# Altium PCB R45_PCBM.PcbDoc (part 7 of 8)
Units mm, origin at the board's own origin, x right, y up, seen from the top; angles counter-clockwise.
Board outline 109 x 109 mm, 4 copper layers (Top Layer, Layer 1, Layer 2, Bottom Layer), stack 0.98 mm thick; 9 components, 0 nets, 14 pads, 1504 vias.
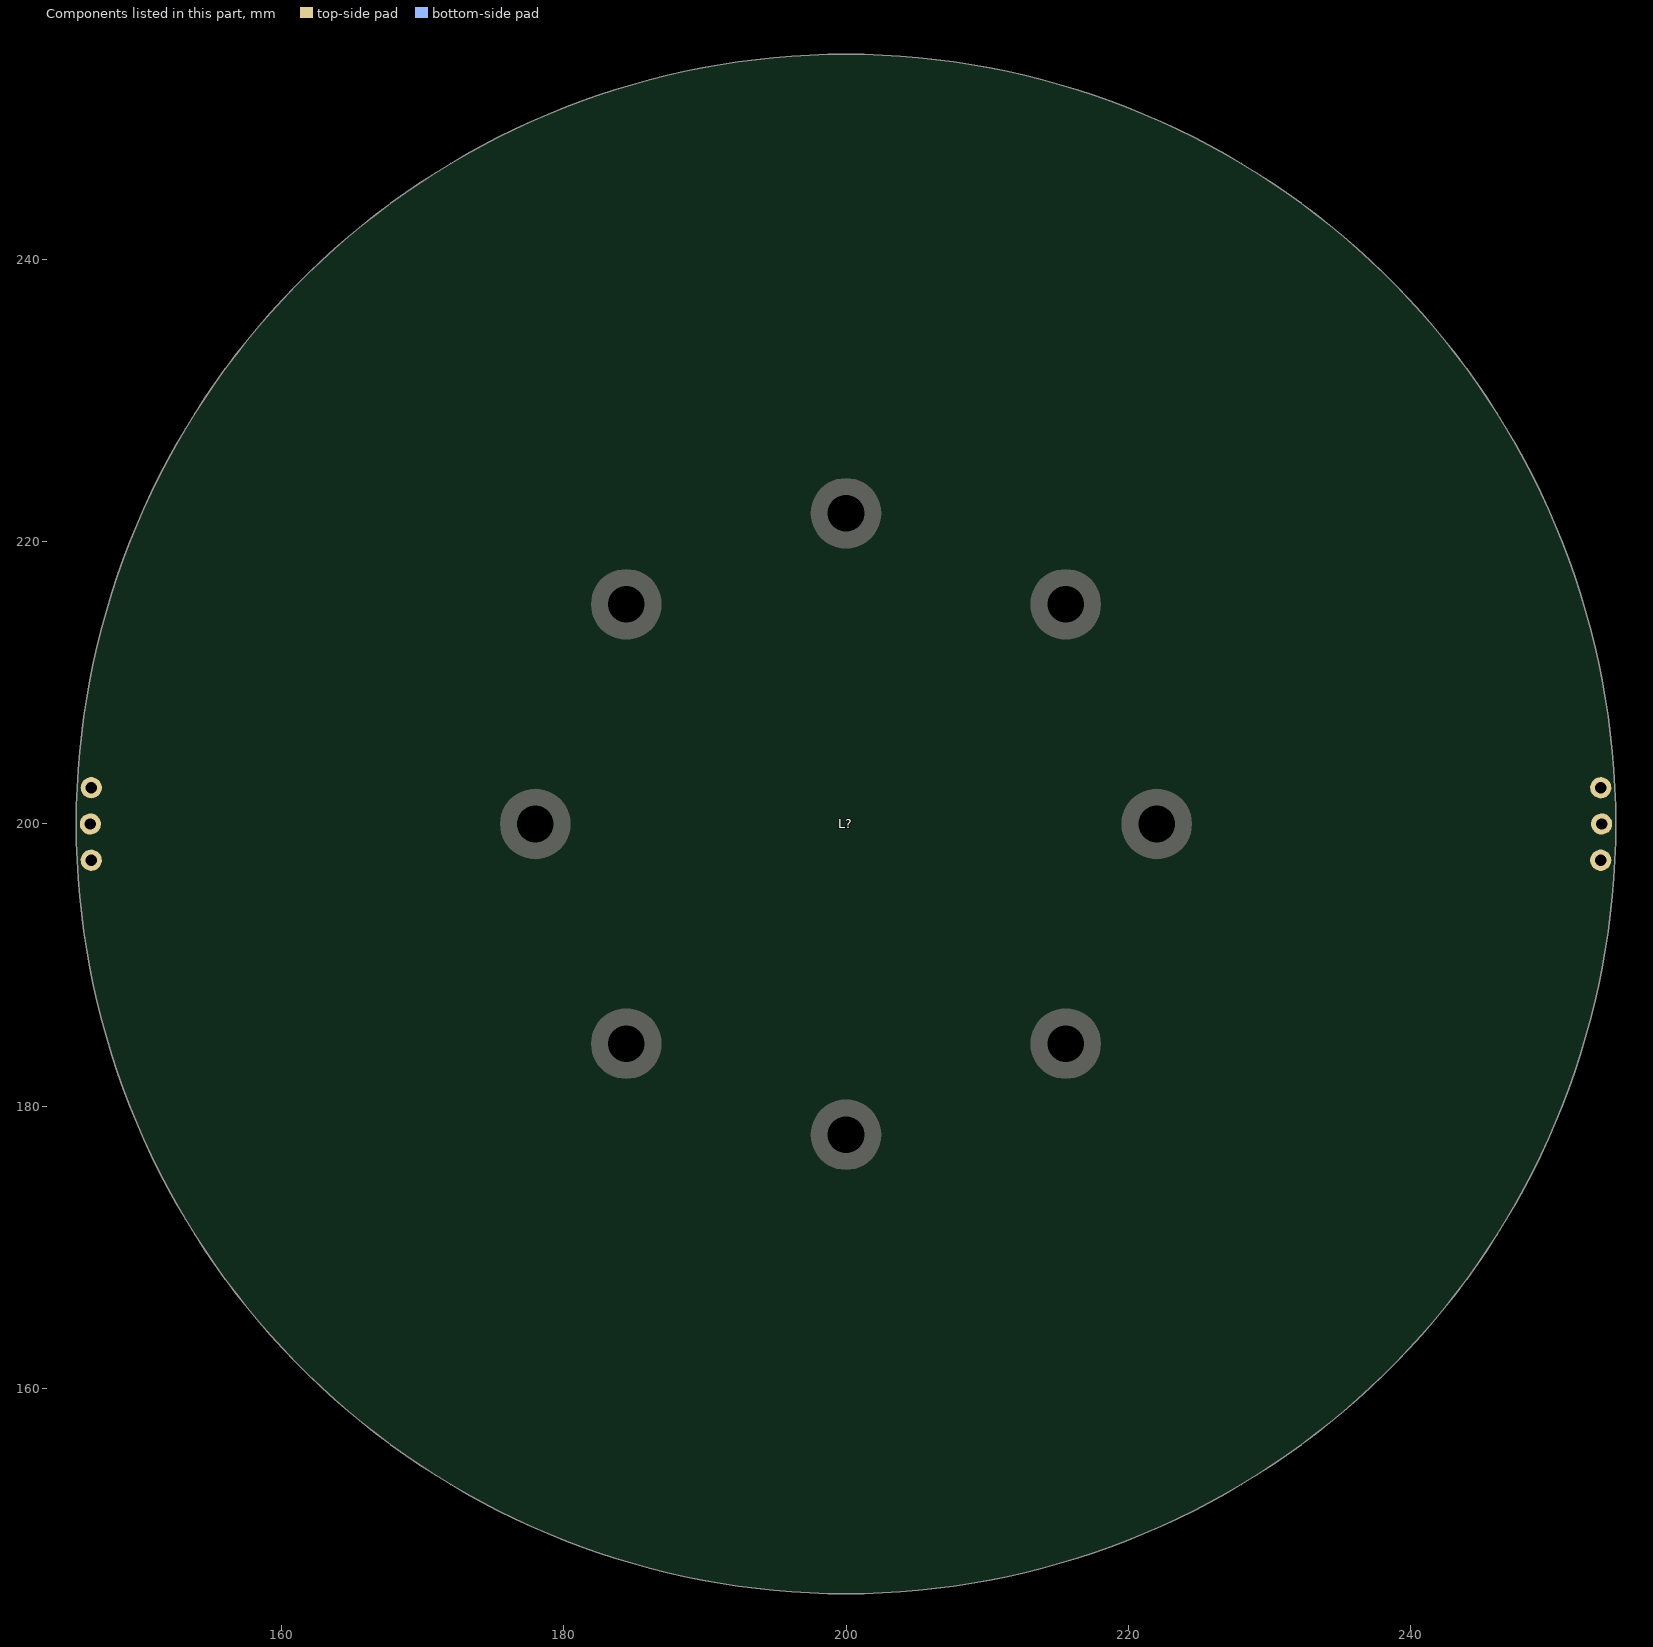
[diagram p9: the components of this part, seen from the top]

## Footprints (in the part's own frame and the unit in brackets; to place one, negate y for a bottom-side part, rotate by r counter-clockwise, add the part's x,y. Pads: shape width x height; smd on the part's side, far side on the other; paste and mask are expansions set on the pad) (continued)
R45_stator [mm] (continued)
  Bottom Layer region: 50.014,8.304 50.012,8.246 49.987,8.192 49.944,8.152 49.889,8.132 49.889,8.132 28.751,4.79 28.675,4.798 28.612,4.842 28.58,4.912 28.58,4.912 28.536,5.159 28.543,5.236 28.586,5.299 28.655,5.332 28.655,5.332 48.431,9.182 48.54,9.227 48.623,9.309 48.668,9.417 48.668,9.534 48.668,9.534 47.166,15.325 44.978,20.893 44.978,20.893 44.908,20.988 44.808,21.048 44.693,21.066 44.579,21.039 44.579,21.039 26.183,12.467 26.037,12.359 25.942,12.204 25.915,12.024 25.958,11.847 25.958,11.847 26.005,11.649 25.972,11.448 25.862,11.276 25.694,11.16 25.694,11.16 25.245,10.97 25.127,10.88 25.066,10.744 25.078,10.596 25.078,10.596 26.285,7.09 26.367,6.966 26.498,6.896 26.647,6.898 26.647,6.898 27.118,7.025 27.322,7.037 27.514,6.969 27.664,6.831 27.749,6.646 27.749,6.646 27.823,6.48 27.956,6.355 28.126,6.29 28.308,6.296 28.308,6.296 46.556,10.514 46.662,10.562 46.743,10.648 46.784,10.757 46.78,10.874 46.78,10.874 45.677,14.841 44.238,18.699 44.238,18.699 44.172,18.796 44.074,18.86 43.959,18.882 43.844,18.859 43.844,18.859 26.738,11.603 26.662,11.592 26.591,11.62 26.543,11.68 26.543,11.68 26.441,11.909 26.428,11.985 26.455,12.057 26.514,12.106 26.514,12.106 44.438,20.47 44.495,20.484 44.553,20.475 44.603,20.445 44.638,20.397 44.638,20.397 46.675,15.166 48.102,9.736 48.102,9.736 48.102,9.677 48.079,9.623 48.038,9.581 47.983,9.559 47.983,9.559 26.07,5.306 25.999,5.309 25.937,5.345 25.899,5.404 25.899,5.404 23.736,11.687 23.729,11.757 23.756,11.823 23.81,11.869 23.81,11.869 45.141,22.745 45.198,22.761 45.256,22.754 45.307,22.725 45.343,22.679 45.343,22.679 48.217,15.667 50.014,8.304
  Bottom Layer region: 40.81,21.222 40.827,21.165 40.821,21.106 40.792,21.054 40.746,21.018 40.746,21.018 25.864,13.44 25.789,13.424 25.715,13.447 25.663,13.503 25.663,13.503 25.545,13.725 25.528,13.8 25.55,13.873 25.605,13.926 25.605,13.926 40.209,22.027 40.266,22.045 40.325,22.04 40.377,22.012 40.414,21.966 40.414,21.966
  Bottom Layer region: 42.489,-17.622 42.805,-16.84 42.816,-16.781 42.804,-16.724 42.77,-16.675 42.72,-16.643 42.72,-16.643 27.127,-10.663 27.051,-10.655 26.98,-10.685 26.934,-10.747 26.934,-10.747 26.84,-10.979 26.831,-11.056 26.86,-11.127 26.921,-11.174 26.921,-11.174 42.291,-17.703 42.349,-17.715 42.407,-17.704 42.457,-17.671 42.489,-17.622
  Bottom Layer region: 43.137,-19.697 43.968,-17.764 44.713,-15.797 44.713,-15.797 44.721,-15.739 44.706,-15.682 44.671,-15.635 44.62,-15.605 44.62,-15.605 27.483,-9.71 27.406,-9.704 27.337,-9.737 27.293,-9.8 27.293,-9.8 27.207,-10.036 27.2,-10.113 27.232,-10.182 27.294,-10.227 27.294,-10.227 43.181,-16.331 43.28,-16.393 43.347,-16.489 43.373,-16.603 43.353,-16.719 43.353,-16.719 43.082,-17.406 42.799,-18.089 42.799,-18.089 42.734,-18.186 42.636,-18.25 42.521,-18.272 42.406,-18.248 42.406,-18.248 26.463,-11.487 26.343,-11.394 26.284,-11.254 26.301,-11.103 26.3,-11.103 26.974,-9.347 27.063,-9.224 27.201,-9.16 27.352,-9.171 27.352,-9.171 43.423,-14.71 43.482,-14.718 43.539,-14.703 43.586,-14.666 43.615,-14.615 43.615,-14.615 43.875,-13.813 43.882,-13.754 43.866,-13.697 43.829,-13.651 43.777,-13.623 43.777,-13.623 26.526,-8.354 26.452,-8.351 26.385,-8.383 26.342,-8.444 26.342,-8.444 25.226,-11.351 25.217,-11.425 25.245,-11.494 25.303,-11.541 25.303,-11.541 42.937,-19.77 42.994,-19.784 43.052,-19.775 43.103,-19.744 43.137,-19.697
  Bottom Layer region: 43.651,-25.787 43.612,-25.83 43.558,-25.856 43.5,-25.859 43.444,-25.839 43.444,-25.839 25.103,-14.812 25.05,-14.756 25.031,-14.682 25.051,-14.608 25.051,-14.608 25.176,-14.391 25.231,-14.336 25.304,-14.316 25.379,-14.334 25.379,-14.334 43.003,-24.097 43.114,-24.133 43.231,-24.123 43.335,-24.069 43.411,-23.98 43.411,-23.98 45.982,-18.578 47.885,-12.906 47.885,-12.906 47.892,-12.789 47.855,-12.678 47.778,-12.59 47.673,-12.538 47.673,-12.538 28.071,-7.28 27.89,-7.268 27.717,-7.327 27.58,-7.447 27.5,-7.61 27.5,-7.61 27.409,-7.793 27.254,-7.925 27.06,-7.986 26.857,-7.967 26.857,-7.967 26.39,-7.824 26.241,-7.817 26.108,-7.882 26.022,-8.003 26.022,-8.003 24.693,-11.465 24.676,-11.612 24.732,-11.75 24.846,-11.844 24.846,-11.844 25.289,-12.05 25.453,-12.171 25.557,-12.347 25.583,-12.549 25.529,-12.745 25.529,-12.745 25.479,-12.921 25.5,-13.102 25.589,-13.26 25.732,-13.373 25.732,-13.373 42.422,-21.871 42.535,-21.903 42.651,-21.889 42.753,-21.832 42.826,-21.739 42.826,-21.739 44.53,-17.991 45.908,-14.111 45.908,-14.111 45.92,-13.995 45.886,-13.882 45.812,-13.792 45.709,-13.736 45.709,-13.736 27.941,-8.299 27.876,-8.258 27.839,-8.191 27.841,-8.114 27.841,-8.114 27.91,-7.873 27.949,-7.807 28.016,-7.769 28.093,-7.769 28.093,-7.769 47.199,-12.883 47.252,-12.909 47.291,-12.953 47.31,-13.009 47.305,-13.068 47.305,-13.068 45.503,-18.385 43.106,-23.461 43.106,-23.461 43.068,-23.506 43.016,-23.533 42.958,-23.538 42.902,-23.52 42.902,-23.52 23.381,-12.693 23.329,-12.645 23.305,-12.578 23.314,-12.508 23.314,-12.508 25.695,-6.305 25.735,-6.246 25.798,-6.213 25.868,-6.212 25.868,-6.212 49.2,-11.592 49.254,-11.616 49.294,-11.659 49.315,-11.714 49.313,-11.773 49.313,-11.773 47.007,-18.992 43.651,-25.787
  Bottom Layer region: 41.156,-20.542 41.526,-19.785 41.541,-19.727 41.533,-19.669 41.502,-19.618 41.455,-19.583 41.455,-19.583 26.317,-12.529 26.241,-12.516 26.169,-12.541 26.119,-12.599 26.119,-12.599 26.009,-12.825 25.994,-12.9 26.018,-12.973 26.076,-13.024 26.076,-13.024 40.954,-20.61 41.01,-20.626 41.069,-20.619 41.121,-20.59 41.156,-20.542
  Bottom Layer region: 24.732,38.784 24.017,39.231 23.961,39.251 23.902,39.249 23.849,39.224 23.809,39.181 23.809,39.181 15.211,24.863 15.19,24.789 15.208,24.715 15.261,24.659 15.261,24.659 15.473,24.526 15.547,24.503 15.622,24.52 15.679,24.571 15.679,24.571 24.778,38.575 24.8,38.63 24.799,38.689 24.775,38.743 24.732,38.784
  Bottom Layer region: 26.888,39.061 25.129,40.215 23.321,41.29 23.321,41.29 23.265,41.308 23.207,41.304 23.154,41.277 23.116,41.232 23.116,41.232 14.334,25.379 14.316,25.304 14.336,25.231 14.391,25.176 14.391,25.176 14.608,25.051 14.682,25.031 14.756,25.05 14.812,25.104 14.812,25.103 23.581,39.689 23.66,39.776 23.766,39.825 23.883,39.831 23.993,39.791 23.993,39.791 24.623,39.405 25.246,39.008 25.246,39.008 25.33,38.926 25.377,38.819 25.378,38.702 25.335,38.593 25.335,38.593 15.907,24.067 15.795,23.964 15.647,23.93 15.501,23.973 15.501,23.973 13.889,24.941 13.783,25.05 13.744,25.197 13.782,25.344 13.782,25.344 22.027,40.209 22.045,40.266 22.04,40.325 22.012,40.377 21.966,40.414 21.966,40.414 21.222,40.81 21.165,40.827 21.106,40.821 21.054,40.792 21.018,40.746 21.018,40.746 12.833,24.672 12.817,24.6 12.838,24.529 12.89,24.476 12.89,24.476 15.559,22.872 15.631,22.85 15.703,22.866 15.759,22.914 15.759,22.914 26.926,38.852 26.949,38.906 26.951,38.964 26.929,39.019 26.888,39.061
  Bottom Layer region: 32.975,38.51 33.011,38.464 33.027,38.407 33.02,38.349 32.99,38.297 32.99,38.297 18.946,22.15 18.882,22.107 18.806,22.101 18.736,22.134 18.736,22.134 18.544,22.295 18.5,22.358 18.492,22.434 18.524,22.504 18.524,22.504 31.198,38.165 31.253,38.269 31.263,38.385 31.228,38.497 31.153,38.587 31.153,38.587 26.28,42.058 21.025,44.916 21.025,44.916 20.911,44.944 20.796,44.926 20.695,44.866 20.626,44.771 20.626,44.771 12.044,26.381 12.001,26.204 12.029,26.024 12.123,25.868 12.27,25.761 12.27,25.761 12.434,25.639 12.537,25.464 12.564,25.262 12.509,25.065 12.509,25.065 12.287,24.63 12.255,24.485 12.296,24.342 12.4,24.237 12.4,24.237 15.578,22.327 15.721,22.285 15.866,22.315 15.979,22.412 15.979,22.412 16.259,22.813 16.406,22.953 16.597,23.024 16.801,23.015 16.985,22.928 16.985,22.928 17.149,22.848 17.331,22.838 17.503,22.898 17.638,23.019 17.638,23.019 28.905,37.98 28.956,38.085 28.963,38.202 28.924,38.313 28.846,38.4 28.846,38.4 25.451,40.73 21.869,42.76 21.869,42.76 21.756,42.792 21.64,42.778 21.537,42.721 21.465,42.629 21.465,42.629 13.024,26.076 12.973,26.018 12.9,25.994 12.825,26.009 12.825,26.009 12.599,26.119 12.541,26.169 12.516,26.241 12.529,26.317 12.529,26.317 20.883,44.245 20.918,44.293 20.968,44.323 21.027,44.332 21.084,44.317 21.084,44.317 26.007,41.62 30.59,38.377 30.59,38.377 30.628,38.332 30.645,38.276 30.64,38.218 30.613,38.166 30.613,38.166 16.56,20.822 16.504,20.779 16.434,20.766 16.366,20.787 16.366,20.787 10.671,24.21 10.62,24.259 10.599,24.327 10.61,24.397 10.61,24.397 19.959,46.44 19.993,46.489 20.042,46.521 20.1,46.531 20.157,46.519 20.157,46.519 26.866,42.995 32.975,38.51
  Bottom Layer region: 27.377,36.964 26.695,37.46 26.641,37.484 26.582,37.486 26.527,37.465 26.484,37.424 26.484,37.424 16.909,23.742 16.882,23.669 16.895,23.594 16.944,23.534 16.944,23.534 17.147,23.387 17.218,23.359 17.294,23.37 17.354,23.418 17.354,23.418 27.409,36.752 27.434,36.806 27.437,36.865 27.417,36.92 27.377,36.964
  Bottom Layer region: 17.622,42.489 17.671,42.457 17.704,42.407 17.715,42.349 17.703,42.291 17.703,42.291 11.174,26.921 11.127,26.86 11.056,26.831 10.979,26.84 10.979,26.84 10.747,26.934 10.685,26.98 10.655,27.051 10.663,27.127 10.663,27.127 16.643,42.72 16.675,42.77 16.724,42.804 16.781,42.816 16.84,42.805 16.84,42.805
  Bottom Layer region: 9.976,44.904 9.151,45.079 9.092,45.08 9.037,45.057 8.995,45.016 8.972,44.961 8.972,44.961 5.79,28.566 5.796,28.49 5.838,28.426 5.906,28.391 5.906,28.391 6.152,28.339 6.229,28.343 6.293,28.384 6.329,28.452 6.329,28.452 10.091,44.723 10.092,44.782 10.071,44.837 10.03,44.88 9.976,44.904
  Bottom Layer region: 11.907,45.902 9.859,46.385 7.793,46.776 7.793,46.776 7.734,46.774 7.68,46.75 7.64,46.707 7.62,46.652 7.62,46.652 4.79,28.751 4.798,28.675 4.842,28.612 4.912,28.58 4.912,28.58 5.159,28.536 5.236,28.543 5.299,28.586 5.332,28.655 5.332,28.655 8.584,45.36 8.629,45.469 8.711,45.552 8.819,45.597 8.937,45.598 8.937,45.598 9.661,45.45 10.382,45.29 10.382,45.29 10.489,45.242 10.569,45.157 10.611,45.048 10.607,44.93 10.607,44.93 6.717,28.056 6.646,27.921 6.519,27.839 6.367,27.829 6.367,27.829 4.521,28.188 4.384,28.254 4.297,28.378 4.282,28.529 4.282,28.529 6.946,45.318 6.944,45.377 6.919,45.431 6.875,45.47 6.819,45.49 6.819,45.49 5.984,45.607 5.925,45.604 5.872,45.578 5.833,45.533 5.814,45.477 5.814,45.477 3.621,27.574 3.631,27.5 3.674,27.44 3.741,27.408 3.741,27.408 6.798,26.814 6.873,26.818 6.936,26.858 6.972,26.922 6.972,26.922 12.014,45.718 12.018,45.777 11.999,45.832 11.96,45.876 11.907,45.902
  Bottom Layer region: 17.815,47.465 17.865,47.434 17.899,47.387 17.912,47.329 17.902,47.271 17.902,47.271 10.227,27.294 10.182,27.232 10.113,27.2 10.036,27.207 10.036,27.207 9.8,27.293 9.737,27.337 9.704,27.406 9.71,27.483 9.71,27.483 16.264,46.534 16.279,46.65 16.249,46.763 16.178,46.856 16.077,46.915 16.077,46.915 10.311,48.51 4.395,49.398 4.395,49.398 4.278,49.386 4.176,49.329 4.102,49.238 4.069,49.126 4.069,49.126 2.295,28.909 2.315,28.728 2.402,28.568 2.544,28.454 2.719,28.404 2.719,28.404 2.915,28.346 3.072,28.216 3.166,28.035 3.182,27.832 3.182,27.832 3.122,27.347 3.141,27.2 3.229,27.08 3.363,27.016 3.363,27.016 7.002,26.309 7.151,26.317 7.277,26.396 7.349,26.526 7.349,26.526 7.476,26.998 7.567,27.18 7.722,27.312 7.916,27.374 8.119,27.354 8.119,27.354 8.3,27.336 8.474,27.388 8.615,27.503 8.702,27.664 8.702,27.664 14.172,45.575 14.184,45.692 14.15,45.804 14.076,45.895 13.973,45.95 13.973,45.95 9.985,46.978 5.925,47.661 5.925,47.661 5.808,47.652 5.703,47.6 5.627,47.511 5.59,47.4 5.59,47.4 3.321,28.958 3.292,28.886 3.232,28.839 3.156,28.827 3.156,28.827 2.906,28.853 2.835,28.88 2.786,28.94 2.773,29.015 2.773,29.015 4.491,48.719 4.507,48.776 4.544,48.822 4.596,48.85 4.655,48.856 4.655,48.856 10.204,48.005 15.619,46.525 15.619,46.525 15.67,46.496 15.706,46.449 15.721,46.392 15.713,46.334 15.713,46.334 8.44,25.23 8.402,25.17 8.34,25.135 8.269,25.131 8.269,25.131 1.747,26.399 1.683,26.429 1.639,26.485 1.626,26.554 1.626,26.554 2.872,50.466 2.887,50.523 2.922,50.57 2.973,50.6 3.031,50.608 3.031,50.608 10.541,49.591 17.815,47.465
  Bottom Layer region: 2.027,45.954 2.084,45.94 2.132,45.905 2.163,45.854 2.171,45.796 2.171,45.796 1.292,29.119 1.269,29.046 1.212,28.994 1.137,28.977 1.137,28.977 0.887,28.985 0.813,29.008 0.76,29.063 0.742,29.138 0.742,29.138 1.029,45.836 1.041,45.894 1.075,45.942 1.125,45.973 1.184,45.983 1.184,45.983
  Bottom Layer region: 13.084,44.098 12.273,44.331 12.214,44.336 12.158,44.317 12.113,44.278 12.087,44.225 12.087,44.225 7.769,28.093 7.769,28.016 7.807,27.949 7.873,27.91 7.873,27.91 8.114,27.841 8.191,27.839 8.258,27.876 8.299,27.941 8.299,27.941 13.186,43.91 13.192,43.969 13.174,44.026 13.136,44.071 13.084,44.098
  Bottom Layer region: 31.091,33.9 31.126,33.852 31.14,33.795 31.131,33.736 31.1,33.686 31.1,33.686 19.707,21.475 19.642,21.435 19.565,21.431 19.497,21.466 19.497,21.466 19.311,21.634 19.269,21.698 19.264,21.775 19.298,21.844 19.298,21.844 30.251,34.451 30.298,34.487 30.355,34.502 30.413,34.494 30.464,34.464 30.464,34.464
  Bottom Layer region: 36.505,27.986 35.986,28.65 35.941,28.689 35.885,28.707 35.826,28.702 35.773,28.675 35.773,28.675 22.798,18.161 22.753,18.099 22.744,18.023 22.774,17.952 22.774,17.952 22.929,17.755 22.99,17.708 23.066,17.698 23.137,17.727 23.137,17.727 36.477,27.774 36.517,27.818 36.536,27.874 36.532,27.933 36.505,27.986
  Bottom Layer region: 38.626,27.509 37.368,29.195 36.037,30.824 36.037,30.824 35.991,30.86 35.934,30.876 35.875,30.869 35.824,30.839 35.824,30.839 22.15,18.946 22.107,18.882 22.101,18.806 22.134,18.736 22.134,18.736 22.295,18.544 22.358,18.5 22.434,18.492 22.504,18.524 22.504,18.524 35.733,29.23 35.837,29.285 35.954,29.295 36.065,29.26 36.155,29.185 36.155,29.185 36.615,28.607 37.065,28.021 37.065,28.021 37.116,27.915 37.123,27.798 37.085,27.688 37.007,27.6 37.007,27.6 23.179,17.175 23.039,17.117 22.888,17.135 22.766,17.225 22.766,17.225 21.582,18.687 21.52,18.825 21.533,18.977 21.619,19.102 21.619,19.102 34.451,30.251 34.487,30.298 34.502,30.355 34.494,30.413 34.464,30.464 34.464,30.464 33.9,31.091 33.852,31.126 33.795,31.14 33.736,31.131 33.686,31.1 33.686,31.1 20.498,18.795 20.458,18.733 20.453,18.659 20.484,18.591 20.484,18.591 22.444,16.171 22.503,16.126 22.577,16.116 22.646,16.142 22.646,16.142 38.59,27.3 38.631,27.342 38.652,27.397 38.65,27.456 38.626,27.509
  Bottom Layer region: 44.157,24.909 44.176,24.853 44.171,24.795 44.144,24.742 44.099,24.704 44.099,24.704 25.379,14.334 25.304,14.316 25.231,14.336 25.176,14.391 25.176,14.391 25.051,14.608 25.031,14.682 25.05,14.756 25.104,14.812 25.104,14.812 42.37,25.193 42.457,25.272 42.506,25.378 42.512,25.495 42.472,25.605 42.472,25.605 39.08,30.533 35.119,35.016 35.119,35.016 35.022,35.081 34.907,35.104 34.792,35.082 34.695,35.017 34.695,35.017 20.34,20.67 20.239,20.519 20.204,20.34 20.239,20.162 20.341,20.01 20.341,20.01 20.453,19.841 20.49,19.64 20.446,19.441 20.328,19.275 20.328,19.275 19.97,18.942 19.89,18.817 19.88,18.669 19.942,18.534 19.942,18.534 22.275,15.653 22.394,15.564 22.541,15.543 22.68,15.596 22.68,15.596 23.08,15.876 23.267,15.957 23.471,15.959 23.659,15.881 23.802,15.736 23.802,15.736 23.929,15.605 24.097,15.533 24.279,15.531 24.448,15.598 24.448,15.598 40.152,25.803 40.236,25.885 40.282,25.993 40.283,26.11 40.24,26.218 40.24,26.218 37.846,29.569 35.175,32.702 35.175,32.702 35.08,32.77 34.966,32.797 34.85,32.779 34.75,32.717 34.75,32.717 21.157,20.048 21.09,20.012 21.013,20.014 20.947,20.054 20.947,20.054 20.773,20.234 20.735,20.302 20.736,20.378 20.775,20.445 20.775,20.445 34.757,34.435 34.805,34.467 34.863,34.479 34.921,34.467 34.97,34.434 34.97,34.434 38.673,30.215 41.871,25.6 41.871,25.6 41.891,25.545 41.889,25.487 41.864,25.433 41.82,25.394 41.82,25.394 22.683,13.902 22.615,13.881 22.545,13.893 22.489,13.936 22.489,13.936 18.307,19.1 18.277,19.164 18.28,19.235 18.314,19.297 18.314,19.297 34.639,36.813 34.687,36.847 34.744,36.861 34.802,36.851 34.852,36.82 34.852,36.82 39.951,31.213 44.157,24.909
  Bottom Layer region: 38.369,25.371 37.897,26.07 37.855,26.112 37.8,26.134 37.741,26.133 37.687,26.109 37.687,26.109 24.009,16.527 23.96,16.468 23.946,16.392 23.971,16.32 23.971,16.32 24.111,16.112 24.169,16.061 24.244,16.046 24.317,16.07 24.317,16.07 38.326,25.162 38.368,25.203 38.391,25.258 38.391,25.317 38.369,25.371
  Bottom Layer region: -41.848,19.094 -42.191,18.323 -42.204,18.265 -42.194,18.207 -42.162,18.158 -42.113,18.124 -42.113,18.124 -26.738,11.603 -26.662,11.592 -26.591,11.62 -26.543,11.68 -26.543,11.68 -26.441,11.909 -26.428,11.985 -26.455,12.057 -26.514,12.106 -26.514,12.106 -41.648,19.169 -41.705,19.182 -41.764,19.173 -41.814,19.142 -41.848,19.094
  Bottom Layer region: -41.156,20.542 -41.526,19.785 -41.541,19.727 -41.533,19.669 -41.502,19.618 -41.455,19.583 -41.455,19.583 -26.183,12.467 -26.037,12.359 -25.942,12.204 -25.915,12.024 -25.958,11.847 -25.958,11.847 -26.005,11.649 -25.972,11.448 -25.862,11.276 -25.694,11.16 -25.694,11.16 -25.63,11.133 -25.51,11.04 -25.451,10.9 -25.467,10.749 -25.467,10.749 -26.119,9.053 -26.207,8.929 -26.345,8.865 -26.497,8.876 -26.497,8.876 -26.562,8.899 -26.764,8.926 -26.961,8.871 -27.12,8.744 -27.217,8.565 -27.217,8.565 -27.304,8.405 -27.445,8.29 -27.619,8.237 -27.8,8.255 -27.8,8.255 -43.91,13.186 -43.969,13.192 -44.026,13.174 -44.071,13.136 -44.098,13.084 -44.098,13.084 -44.331,12.273 -44.336,12.214 -44.317,12.158 -44.278,12.113 -44.225,12.087 -44.225,12.087 -25.992,7.207 -25.92,7.205 -25.855,7.238 -25.813,7.298 -25.813,7.298 -24.066,11.849 -24.057,11.921 -24.083,11.989 -24.138,12.036 -24.138,12.036 -40.954,20.61 -41.01,20.626 -41.069,20.619 -41.121,20.59 -41.156,20.542
  Bottom Layer region: -45.49,6.819 -45.607,5.984 -45.604,5.925 -45.578,5.872 -45.533,5.833 -45.477,5.814 -45.477,5.814 -28.901,3.784 -28.825,3.794 -28.764,3.841 -28.734,3.912 -28.734,3.912 -28.699,4.16 -28.708,4.236 -28.754,4.298 -28.824,4.329 -28.824,4.329 -45.318,6.946 -45.377,6.944 -45.431,6.919 -45.47,6.875 -45.49,6.819
  Bottom Layer region: -45.371,-7.572 -45.224,-8.402 -45.203,-8.458 -45.162,-8.5 -45.107,-8.523 -45.048,-8.524 -45.048,-8.524 -28.511,-5.304 -28.329,-5.305 -28.161,-5.376 -28.033,-5.505 -27.964,-5.673 -27.964,-5.673 -27.886,-5.862 -27.74,-6.005 -27.551,-6.079 -27.347,-6.074 -27.347,-6.074 -26.065,-5.777 -25.92,-5.78 -25.793,-5.85 -25.714,-5.972 -25.714,-5.972 -23.939,-11.125 -23.927,-11.269 -23.984,-11.403 -24.096,-11.494 -24.096,-11.494 -25.289,-12.05 -25.453,-12.171 -25.557,-12.347 -25.583,-12.549 -25.529,-12.745 -25.529,-12.745 -25.479,-12.921 -25.5,-13.102 -25.589,-13.26 -25.732,-13.373 -25.732,-13.373 -40.746,-21.018 -40.792,-21.054 -40.821,-21.106 -40.827,-21.165 -40.81,-21.222 -40.81,-21.222 -40.414,-21.966 -40.377,-22.012 -40.325,-22.04 -40.266,-22.045 -40.209,-22.027 -40.209,-22.027 -22.695,-12.312 -22.644,-12.266 -22.619,-12.201 -22.626,-12.132 -22.626,-12.132 -25.299,-4.37 -25.336,-4.311 -25.395,-4.275 -25.464,-4.27 -25.464,-4.27 -45.247,-7.398 -45.302,-7.418 -45.345,-7.459 -45.369,-7.513 -45.371,-7.572
  Bottom Layer region: -44.732,-10.718 -44.528,-11.537 -44.503,-11.59 -44.459,-11.63 -44.403,-11.649 -44.344,-11.645 -44.344,-11.645 -28.071,-7.28 -27.89,-7.268 -27.717,-7.327 -27.58,-7.447 -27.5,-7.61 -27.5,-7.61 -27.409,-7.793 -27.254,-7.925 -27.06,-7.986 -26.857,-7.967 -26.857,-7.967 -26.79,-7.946 -26.638,-7.94 -26.503,-8.009 -26.419,-8.136 -26.419,-8.136 -25.827,-9.854 -25.815,-10.006 -25.88,-10.143 -26.003,-10.232 -26.003,-10.232 -26.068,-10.257 -26.24,-10.366 -26.356,-10.534 -26.396,-10.734 -26.355,-10.934 -26.355,-10.934 -26.318,-11.112 -26.352,-11.291 -26.452,-11.443 -26.603,-11.546 -26.603,-11.546 -42.113,-18.124 -42.162,-18.158 -42.194,-18.207 -42.204,-18.265 -42.191,-18.323 -42.191,-18.323 -41.848,-19.094 -41.814,-19.142 -41.764,-19.173 -41.705,-19.182 -41.648,-19.169 -41.648,-19.169 -24.543,-11.187 -24.487,-11.141 -24.459,-11.074 -24.465,-11.002 -24.465,-11.002 -26.052,-6.393 -26.092,-6.332 -26.155,-6.296 -26.228,-6.295 -26.228,-6.295 -44.62,-10.536 -44.674,-10.56 -44.714,-10.604 -44.735,-10.659 -44.732,-10.718
  Bottom Layer region: -44.331,-12.273 -44.098,-13.084 -44.071,-13.136 -44.026,-13.174 -43.969,-13.192 -43.91,-13.186 -43.91,-13.186 -27.941,-8.299 -27.876,-8.258 -27.839,-8.191 -27.841,-8.114 -27.841,-8.114 -27.91,-7.873 -27.949,-7.807 -28.016,-7.769 -28.093,-7.769 -28.093,-7.769 -44.225,-12.087 -44.278,-12.113 -44.317,-12.158 -44.336,-12.214 -44.331,-12.273
  Bottom Layer region: -45.079,-9.151 -44.904,-9.976 -44.88,-10.03 -44.837,-10.071 -44.782,-10.092 -44.723,-10.091 -44.723,-10.091 -28.452,-6.329 -28.384,-6.293 -28.343,-6.229 -28.339,-6.152 -28.339,-6.152 -28.391,-5.906 -28.426,-5.838 -28.49,-5.796 -28.566,-5.79 -28.566,-5.79 -44.961,-8.972 -45.016,-8.995 -45.057,-9.037 -45.08,-9.092 -45.079,-9.151
  Bottom Layer region: -45.789,-4.389 -45.7,-5.227 -45.683,-5.284 -45.645,-5.329 -45.592,-5.356 -45.533,-5.36 -45.533,-5.36 -28.958,-3.321 -28.886,-3.292 -28.839,-3.232 -28.827,-3.156 -28.827,-3.156 -28.853,-2.906 -28.88,-2.835 -28.94,-2.786 -29.015,-2.773 -29.015,-2.773 -45.652,-4.223 -45.709,-4.24 -45.755,-4.277 -45.783,-4.33 -45.789,-4.389
  Bottom Layer region: -45.224,8.402 -45.371,7.572 -45.369,7.513 -45.345,7.459 -45.302,7.418 -45.247,7.398 -45.247,7.398 -28.606,4.767 -28.435,4.704 -28.301,4.58 -28.225,4.415 -28.218,4.233 -28.218,4.233 -28.209,4.029 -28.121,3.845 -27.968,3.71 -27.775,3.646 -27.775,3.646 -26.469,3.486 -26.333,3.434 -26.238,3.324 -26.206,3.183 -26.206,3.183 -26.301,-2.266 -26.338,-2.406 -26.437,-2.513 -26.575,-2.56 -26.575,-2.56 -27.886,-2.674 -28.081,-2.732 -28.238,-2.862 -28.332,-3.042 -28.348,-3.246 -28.348,-3.246 -28.362,-3.427 -28.444,-3.59 -28.582,-3.709 -28.754,-3.766 -28.754,-3.766 -45.477,-5.814 -45.533,-5.833 -45.578,-5.872 -45.604,-5.925 -45.607,-5.984 -45.607,-5.984 -45.49,-6.819 -45.47,-6.875 -45.431,-6.919 -45.377,-6.944 -45.318,-6.946 -45.318,-6.946 -25.537,-3.808 -25.473,-3.781 -25.428,-3.729 -25.411,-3.662 -25.411,-3.662 -25.268,4.547 -25.282,4.614 -25.326,4.668 -25.389,4.697 -25.389,4.697 -45.048,8.524 -45.107,8.523 -45.162,8.5 -45.203,8.458 -45.224,8.402
  Bottom Layer region: -39.623,23.363 -40.045,22.633 -40.064,22.577 -40.06,22.518 -40.033,22.465 -39.988,22.427 -39.988,22.427 -25.25,14.263 -25.111,14.145 -25.028,13.984 -25.013,13.802 -25.068,13.629 -25.068,13.629 -25.13,13.434 -25.11,13.231 -25.013,13.052 -24.853,12.926 -24.853,12.926 -23.681,12.328 -23.571,12.233 -23.519,12.098 -23.537,11.954 -23.537,11.954 -25.49,6.866 -25.573,6.747 -25.702,6.681 -25.847,6.684 -25.847,6.684 -27.118,7.025 -27.322,7.037 -27.514,6.969 -27.664,6.831 -27.749,6.646 -27.749,6.646 -27.823,6.48 -27.956,6.355 -28.126,6.29 -28.308,6.296 -28.308,6.296 -44.723,10.091 -44.782,10.092 -44.837,10.071 -44.88,10.03 -44.904,9.976 -44.904,9.976 -45.079,9.151 -45.08,9.092 -45.057,9.037 -45.016,8.995 -44.961,8.972 -44.961,8.972 -25.3,5.156 -25.23,5.159 -25.17,5.193 -25.131,5.25 -25.131,5.25 -22.189,12.914 -22.179,12.983 -22.202,13.048 -22.251,13.097 -22.251,13.097 -39.416,23.417 -39.472,23.437 -39.531,23.434 -39.584,23.408 -39.623,23.363
  Bottom Layer region: -40.414,21.966 -40.81,21.222 -40.827,21.165 -40.821,21.106 -40.792,21.054 -40.746,21.018 -40.746,21.018 -25.864,13.44 -25.789,13.424 -25.715,13.447 -25.663,13.503 -25.663,13.503 -25.545,13.725 -25.528,13.8 -25.55,13.873 -25.605,13.926 -25.605,13.926 -40.209,22.027 -40.266,22.045 -40.325,22.04 -40.377,22.012 -40.414,21.966
  Bottom Layer region: -41.526,-19.785 -41.156,-20.542 -41.121,-20.59 -41.069,-20.619 -41.01,-20.626 -40.954,-20.61 -40.954,-20.61 -26.076,-13.024 -26.018,-12.973 -25.994,-12.9 -26.009,-12.825 -26.009,-12.825 -26.119,-12.599 -26.169,-12.541 -26.241,-12.516 -26.317,-12.529 -26.317,-12.529 -41.455,-19.583 -41.502,-19.618 -41.533,-19.669 -41.541,-19.727 -41.526,-19.785
  Bottom Layer region: -45.983,-1.184 -45.954,-2.027 -45.94,-2.084 -45.905,-2.132 -45.854,-2.163 -45.796,-2.171 -45.796,-2.171 -29.119,-1.292 -29.046,-1.269 -28.994,-1.212 -28.977,-1.137 -28.977,-1.137 -28.985,-0.887 -29.008,-0.813 -29.063,-0.76 -29.138,-0.742 -29.138,-0.742 -45.836,-1.029 -45.894,-1.041 -45.942,-1.075 -45.973,-1.125 -45.983,-1.184
  Bottom Layer region: -45.7,5.227 -45.789,4.389 -45.783,4.33 -45.755,4.277 -45.709,4.24 -45.652,4.223 -45.652,4.223 -28.868,2.76 -28.694,2.709 -28.552,2.595 -28.464,2.435 -28.444,2.254 -28.444,2.254 -28.421,2.052 -28.321,1.874 -28.159,1.75 -27.962,1.699 -27.962,1.699 -27.892,1.696 -27.748,1.65 -27.644,1.539 -27.608,1.391 -27.608,1.391 -27.64,-0.427 -27.681,-0.573 -27.788,-0.68 -27.935,-0.721 -27.935,-0.721 -28.004,-0.722 -28.203,-0.766 -28.369,-0.885 -28.475,-1.059 -28.506,-1.26 -28.506,-1.26 -28.532,-1.44 -28.625,-1.597 -28.771,-1.706 -28.947,-1.751 -28.947,-1.751 -45.772,-2.628 -45.829,-2.642 -45.876,-2.678 -45.906,-2.729 -45.914,-2.788 -45.914,-2.788 -45.855,-3.629 -45.839,-3.686 -45.803,-3.733 -45.751,-3.762 -45.692,-3.768 -45.692,-3.768 -26.889,-2.118 -26.821,-2.094 -26.771,-2.041 -26.753,-1.971 -26.753,-1.971 -26.667,2.903 -26.684,2.974 -26.731,3.029 -26.799,3.055 -26.799,3.055 -45.533,5.36 -45.592,5.356 -45.645,5.329 -45.683,5.284 -45.7,5.227
  Bottom Layer region: -45.983,1.184 -45.973,1.125 -45.942,1.075 -45.894,1.041 -45.836,1.029 -45.836,1.029 -29.141,0.742 -29.083,0.73 -29.035,0.696 -29.004,0.647 -28.993,0.589 -28.993,0.589 -28.996,0.423 -29.009,0.366 -29.042,0.318 -29.091,0.286 -29.149,0.275 -29.149,0.275 -45.844,0.572 -45.902,0.561 -45.952,0.529 -45.985,0.48 -45.996,0.422 -45.996,0.422 -45.996,-0.422 -45.985,-0.48 -45.952,-0.529 -45.902,-0.561 -45.844,-0.572 -45.844,-0.572 -28.239,-0.259 -28.165,-0.239 -28.112,-0.185 -28.091,-0.112 -28.091,-0.112 -28.07,1.092 -28.088,1.166 -28.14,1.222 -28.212,1.245 -28.212,1.245 -45.796,2.171 -45.854,2.163 -45.905,2.132 -45.94,2.084 -45.954,2.027 -45.954,2.027
  Bottom Layer region: -45.855,3.629 -45.914,2.788 -45.906,2.729 -45.876,2.678 -45.829,2.642 -45.772,2.628 -45.772,2.628 -29.094,1.758 -29.019,1.774 -28.962,1.825 -28.937,1.898 -28.937,1.898 -28.919,2.148 -28.934,2.223 -28.984,2.282 -29.056,2.308 -29.056,2.308 -45.692,3.768 -45.751,3.762 -45.803,3.733 -45.839,3.686 -45.855,3.629
  Bottom Layer region: -42.805,-16.84 -42.489,-17.622 -42.457,-17.671 -42.407,-17.704 -42.349,-17.715 -42.291,-17.703 -42.291,-17.703 -26.921,-11.174 -26.86,-11.127 -26.831,-11.056 -26.84,-10.979 -26.84,-10.979 -26.934,-10.747 -26.98,-10.685 -27.051,-10.655 -27.127,-10.663 -27.127,-10.663 -42.72,-16.643 -42.77,-16.675 -42.804,-16.724 -42.816,-16.781 -42.805,-16.84
  Bottom Layer region: -43.615,-14.615 -43.586,-14.666 -43.539,-14.703 -43.482,-14.718 -43.423,-14.71 -43.423,-14.71 -27.637,-9.269 -27.579,-9.262 -27.522,-9.276 -27.476,-9.312 -27.446,-9.362 -27.446,-9.362 -27.392,-9.52 -27.384,-9.578 -27.399,-9.635 -27.435,-9.681 -27.485,-9.711 -27.485,-9.711 -43.275,-15.142 -43.326,-15.172 -43.361,-15.22 -43.376,-15.277 -43.367,-15.335 -43.367,-15.335 -43.078,-16.128 -43.047,-16.178 -43,-16.213 -42.942,-16.227 -42.884,-16.217 -42.884,-16.217 -26.447,-9.902 -26.385,-9.858 -26.353,-9.789 -26.359,-9.713 -26.359,-9.713 -26.751,-8.574 -26.793,-8.511 -26.861,-8.476 -26.937,-8.48 -26.937,-8.48 -43.777,-13.623 -43.829,-13.651 -43.866,-13.697 -43.882,-13.754 -43.875,-13.813 -43.875,-13.813
  Bottom Layer region: -43.615,14.615 -43.875,13.813 -43.882,13.754 -43.866,13.697 -43.829,13.651 -43.777,13.623 -43.777,13.623 -27.805,8.745 -27.728,8.742 -27.66,8.777 -27.618,8.842 -27.618,8.842 -27.541,9.08 -27.536,9.157 -27.571,9.226 -27.634,9.269 -27.634,9.269 -43.423,14.71 -43.482,14.718 -43.539,14.703 -43.586,14.666 -43.615,14.615
  Bottom Layer region: -42.805,16.84 -42.816,16.781 -42.804,16.724 -42.77,16.675 -42.72,16.643 -42.72,16.643 -27.129,10.664 -27.08,10.633 -27.046,10.585 -27.033,10.528 -27.043,10.47 -27.043,10.47 -27.103,10.315 -27.134,10.265 -27.182,10.231 -27.239,10.218 -27.297,10.228 -27.297,10.228 -42.884,16.217 -42.942,16.227 -43,16.213 -43.047,16.178 -43.078,16.128 -43.078,16.128 -43.367,15.335 -43.376,15.277 -43.361,15.22 -43.326,15.172 -43.275,15.142 -43.275,15.142 -26.624,9.414 -26.549,9.409 -26.48,9.441 -26.435,9.503 -26.435,9.503 -26.004,10.627 -25.995,10.703 -26.025,10.772 -26.085,10.819 -26.085,10.819 -42.291,17.703 -42.349,17.715 -42.407,17.704 -42.457,17.671 -42.489,17.622 -42.489,17.622
  Bottom Layer region: -44.528,11.537 -44.732,10.718 -44.735,10.659 -44.714,10.604 -44.674,10.56 -44.62,10.536 -44.62,10.536 -28.347,6.784 -28.27,6.786 -28.205,6.826 -28.168,6.894 -28.168,6.894 -28.107,7.137 -28.108,7.214 -28.147,7.28 -28.214,7.318 -28.214,7.318 -44.344,11.645 -44.403,11.649 -44.459,11.63 -44.503,11.59 -44.528,11.537
  Bottom Layer region: -39.231,-24.017 -38.784,-24.732 -38.743,-24.775 -38.689,-24.799 -38.63,-24.8 -38.575,-24.778 -38.575,-24.778 -24.571,-15.679 -24.52,-15.622 -24.503,-15.547 -24.526,-15.473 -24.526,-15.473 -24.659,-15.261 -24.715,-15.208 -24.789,-15.19 -24.863,-15.211 -24.863,-15.211 -39.181,-23.809 -39.224,-23.849 -39.249,-23.902 -39.251,-23.961 -39.231,-24.017
  Bottom Layer region: -38.626,-27.509 -38.65,-27.456 -38.652,-27.397 -38.631,-27.342 -38.59,-27.3 -38.59,-27.3 -23.742,-16.909 -23.669,-16.882 -23.594,-16.895 -23.534,-16.944 -23.534,-16.944 -23.387,-17.147 -23.359,-17.218 -23.37,-17.294 -23.418,-17.354 -23.418,-17.354 -37.007,-27.6 -37.085,-27.688 -37.123,-27.798 -37.116,-27.915 -37.065,-28.021 -37.065,-28.021 -36.615,-28.607 -36.155,-29.185 -36.155,-29.185 -36.065,-29.26 -35.954,-29.295 -35.837,-29.285 -35.733,-29.23 -35.733,-29.23 -22.506,-18.525 -22.469,-18.48 -22.452,-18.425 -22.457,-18.366 -22.484,-18.314 -22.484,-18.314 -22.589,-18.185 -22.634,-18.148 -22.69,-18.13 -22.748,-18.136 -22.8,-18.163 -22.8,-18.163 -35.773,-28.675 -35.826,-28.702 -35.885,-28.707 -35.941,-28.689 -35.986,-28.65 -35.986,-28.65 -36.505,-27.986 -36.532,-27.933 -36.536,-27.874 -36.517,-27.818 -36.477,-27.774 -36.477,-27.774 -22.412,-17.181 -22.342,-17.152 -22.266,-17.161 -22.205,-17.206 -22.205,-17.206 -21.447,-18.143 -21.416,-18.212 -21.423,-18.287 -21.465,-18.35 -21.465,-18.35 -35.824,-30.839 -35.875,-30.869 -35.934,-30.876 -35.991,-30.86 -36.037,-30.824 -36.037,-30.824 -37.368,-29.195 -38.626,-27.509
  Bottom Layer region: -40.808,-26.953 -40.83,-26.898 -40.829,-26.839 -40.806,-26.785 -40.764,-26.744 -40.764,-26.744 -22.493,-14.886 -22.424,-14.862 -22.353,-14.874 -22.295,-14.917 -22.295,-14.917 -19.227,-18.706 -19.196,-18.772 -19.2,-18.844 -19.237,-18.906 -19.237,-18.906 -32.58,-32.257 -32.629,-32.29 -32.688,-32.301 -32.745,-32.289 -32.794,-32.255 -32.794,-32.255 -33.38,-31.648 -33.412,-31.599 -33.422,-31.54 -33.409,-31.483 -33.374,-31.435 -33.374,-31.435 -21.049,-19.948 -20.943,-19.8 -20.901,-19.623 -20.931,-19.443 -21.027,-19.288 -21.027,-19.288 -21.133,-19.115 -21.163,-18.913 -21.112,-18.716 -20.988,-18.554 -20.988,-18.554 -20.935,-18.508 -20.85,-18.383 -20.836,-18.232 -20.899,-18.093 -20.899,-18.093 -22.043,-16.681 -22.165,-16.591 -22.316,-16.572 -22.457,-16.63 -22.457,-16.63 -22.512,-16.672 -22.696,-16.76 -22.9,-16.768 -23.091,-16.697 -23.239,-16.557 -23.239,-16.557 -23.37,-16.431 -23.54,-16.365 -23.722,-16.369 -23.888,-16.442 -23.888,-16.442 -39.125,-27.117 -39.206,-27.202 -39.248,-27.311 -39.245,-27.428 -39.198,-27.535 -39.198,-27.535 -37.748,-29.492 -36.2,-31.372 -36.2,-31.372 -36.107,-31.444 -35.994,-31.475 -35.878,-31.46 -35.777,-31.402 -35.776,-31.402 -21.844,-19.298 -21.775,-19.264 -21.698,-19.269 -21.634,-19.311 -21.634,-19.311 -21.466,-19.497 -21.431,-19.565 -21.435,-19.642 -21.475,-19.707 -21.475,-19.707 -35.811,-33.083 -35.862,-33.114 -35.92,-33.124 -35.977,-33.11 -36.024,-33.075 -36.024,-33.075 -38.538,-30.109 -40.808,-26.953
  Bottom Layer region: -44.157,-24.909 -44.176,-24.853 -44.171,-24.795 -44.144,-24.742 -44.099,-24.704 -44.099,-24.704 -22.468,-12.722 -22.401,-12.703 -22.333,-12.716 -22.279,-12.759 -22.279,-12.759 -17.112,-19.139 -17.082,-19.201 -17.083,-19.271 -17.115,-19.332 -17.115,-19.332 -30.251,-34.451 -30.298,-34.487 -30.355,-34.502 -30.413,-34.494 -30.464,-34.464 -30.464,-34.464 -31.091,-33.9 -31.126,-33.852 -31.14,-33.795 -31.131,-33.736 -31.1,-33.686 -31.1,-33.686 -19.607,-21.368 -19.511,-21.213 -19.482,-21.033 -19.523,-20.856 -19.63,-20.708 -19.63,-20.708 -19.748,-20.542 -19.792,-20.343 -19.755,-20.143 -19.643,-19.973 -19.643,-19.973 -18.712,-19.043 -18.637,-18.918 -18.629,-18.773 -18.691,-18.642 -18.691,-18.642 -22.12,-14.407 -22.236,-14.319 -22.38,-14.296 -22.517,-14.344 -22.517,-14.344 -23.62,-15.061 -23.81,-15.136 -24.014,-15.13 -24.199,-15.046 -24.337,-14.895 -24.337,-14.895 -24.459,-14.761 -24.624,-14.683 -24.806,-14.674 -24.977,-14.736 -24.977,-14.736 -42.37,-25.193 -42.457,-25.272 -42.506,-25.378 -42.512,-25.495 -42.472,-25.605 -42.472,-25.605 -39.08,-30.533 -35.119,-35.016 -35.119,-35.016 -35.022,-35.081 -34.907,-35.104 -34.792,-35.082 -34.695,-35.017 -34.695,-35.017 -20.445,-20.775 -20.378,-20.736 -20.302,-20.735 -20.234,-20.773 -20.234,-20.773 -20.054,-20.947 -20.014,-21.013 -20.012,-21.09 -20.048,-21.157 -20.048,-21.157 -34.639,-36.813 -34.687,-36.847 -34.744,-36.861 -34.802,-36.851 -34.852,-36.82 -34.852,-36.82 -39.951,-31.213 -44.157,-24.909
  Bottom Layer region: -28.65,-35.986 -27.986,-36.505 -27.933,-36.532 -27.874,-36.536 -27.818,-36.517 -27.774,-36.477 -27.774,-36.477 -17.727,-23.137 -17.698,-23.066 -17.708,-22.99 -17.755,-22.929 -17.755,-22.929 -17.952,-22.774 -18.023,-22.744 -18.099,-22.753 -18.161,-22.798 -18.161,-22.798 -28.675,-35.773 -28.702,-35.826 -28.707,-35.885 -28.689,-35.941 -28.65,-35.986
  Bottom Layer region: -26.888,-39.061 -26.929,-39.019 -26.951,-38.964 -26.949,-38.906 -26.926,-38.852 -26.926,-38.852 -16.527,-24.009 -16.468,-23.96 -16.392,-23.946 -16.32,-23.971 -16.32,-23.971 -16.112,-24.111 -16.061,-24.169 -16.046,-24.244 -16.07,-24.317 -16.07,-24.317 -25.335,-38.593 -25.378,-38.702 -25.377,-38.819 -25.33,-38.926 -25.246,-39.008 -25.246,-39.008 -24.623,-39.405 -23.993,-39.791 -23.993,-39.791 -23.883,-39.831 -23.766,-39.825 -23.66,-39.776 -23.581,-39.689 -23.581,-39.689 -14.813,-25.106 -14.793,-25.051 -14.796,-24.992 -14.821,-24.939 -14.864,-24.9 -14.864,-24.9 -15.007,-24.814 -15.062,-24.794 -15.121,-24.797 -15.173,-24.822 -15.213,-24.866 -15.213,-24.866 -23.809,-39.181 -23.849,-39.224 -23.902,-39.249 -23.961,-39.251 -24.017,-39.231 -24.017,-39.231 -24.732,-38.784 -24.775,-38.743 -24.799,-38.689 -24.8,-38.63 -24.778,-38.575 -24.778,-38.575 -15.184,-23.81 -15.128,-23.759 -15.054,-23.742 -14.981,-23.763 -14.981,-23.763 -13.949,-24.384 -13.896,-24.438 -13.876,-24.511 -13.895,-24.585 -13.895,-24.585 -23.116,-41.232 -23.154,-41.277 -23.207,-41.304 -23.265,-41.308 -23.321,-41.29 -23.321,-41.29 -25.129,-40.215 -26.888,-39.061
  Bottom Layer region: -32.975,-38.51 -33.011,-38.464 -33.027,-38.407 -33.02,-38.349 -32.99,-38.297 -32.99,-38.297 -16.762,-19.639 -16.706,-19.599 -16.637,-19.588 -16.571,-19.609 -16.571,-19.609 -9.534,-23.837 -9.485,-23.886 -9.462,-23.951 -9.471,-24.02 -9.471,-24.02 -16.643,-42.72 -16.675,-42.77 -16.724,-42.804 -16.781,-42.816 -16.84,-42.805 -16.84,-42.805 -17.622,-42.489 -17.671,-42.457 -17.704,-42.407 -17.715,-42.349 -17.703,-42.291 -17.703,-42.291 -11.116,-26.785 -11.079,-26.607 -11.113,-26.428 -11.213,-26.276 -11.363,-26.173 -11.363,-26.173 -11.531,-26.058 -11.641,-25.886 -11.675,-25.685 -11.627,-25.487 -11.627,-25.487 -11.07,-24.294 -11.043,-24.152 -11.085,-24.013 -11.188,-23.91 -11.188,-23.91 -15.859,-21.103 -15.998,-21.061 -16.14,-21.089 -16.253,-21.18 -16.253,-21.18 -17.045,-22.231 -17.197,-22.366 -17.391,-22.431 -17.594,-22.415 -17.775,-22.321 -17.775,-22.321 -17.936,-22.236 -18.117,-22.219 -18.291,-22.273 -18.431,-22.39 -18.431,-22.39 -31.198,-38.165 -31.253,-38.269 -31.263,-38.385 -31.228,-38.497 -31.153,-38.587 -31.153,-38.587 -26.28,-42.058 -21.025,-44.916 -21.025,-44.916 -20.911,-44.944 -20.796,-44.926 -20.695,-44.866 -20.626,-44.771 -20.626,-44.771 -12.106,-26.514 -12.057,-26.455 -11.985,-26.428 -11.909,-26.441 -11.909,-26.441 -11.68,-26.543 -11.62,-26.591 -11.592,-26.662 -11.603,-26.738 -11.603,-26.738 -19.959,-46.44 -19.993,-46.489 -20.042,-46.521 -20.1,-46.531 -20.157,-46.519 -20.157,-46.519 -26.866,-42.995 -32.975,-38.51
  Bottom Layer region: -29.128,-39.284 -29.168,-39.241 -29.188,-39.185 -29.184,-39.126 -29.159,-39.073 -29.159,-39.073 -16.045,-21.681 -15.989,-21.636 -15.918,-21.622 -15.848,-21.643 -15.848,-21.643 -11.669,-24.154 -11.618,-24.205 -11.597,-24.275 -11.611,-24.346 -11.611,-24.346 -19.583,-41.455 -19.618,-41.502 -19.669,-41.533 -19.727,-41.541 -19.785,-41.526 -19.785,-41.526 -20.542,-41.156 -20.59,-41.121 -20.619,-41.069 -20.626,-41.01 -20.61,-40.954 -20.61,-40.954 -12.957,-25.944 -12.908,-25.769 -12.929,-25.588 -13.018,-25.429 -13.161,-25.317 -13.161,-25.317 -13.321,-25.19 -13.418,-25.011 -13.438,-24.808 -13.376,-24.614 -13.376,-24.614 -13.343,-24.553 -13.305,-24.405 -13.344,-24.259 -13.45,-24.15 -13.45,-24.15 -15.009,-23.214 -15.154,-23.171 -15.302,-23.205 -15.415,-23.308 -15.415,-23.308 -15.453,-23.366 -15.595,-23.511 -15.784,-23.589 -15.987,-23.588 -16.174,-23.506 -16.174,-23.506 -16.341,-23.433 -16.523,-23.429 -16.693,-23.495 -16.824,-23.621 -16.824,-23.621 -27.491,-38.863 -27.538,-38.97 -27.54,-39.087 -27.498,-39.196 -27.416,-39.281 -27.416,-39.281 -25.384,-40.624 -23.287,-41.861 -23.287,-41.861 -23.175,-41.897 -23.059,-41.888 -22.954,-41.834 -22.879,-41.745 -22.879,-41.745 -13.926,-25.605 -13.873,-25.55 -13.8,-25.528 -13.725,-25.545 -13.725,-25.545 -13.503,-25.663 -13.447,-25.715 -13.424,-25.789 -13.44,-25.864 -13.44,-25.864 -22.337,-43.336 -22.373,-43.383 -22.424,-43.411 -22.483,-43.418 -22.539,-43.402 -22.539,-43.402 -25.916,-41.474 -29.128,-39.284
  Bottom Layer region: -14.615,-43.615 -13.813,-43.875 -13.754,-43.882 -13.697,-43.866 -13.651,-43.829 -13.623,-43.777 -13.623,-43.777 -8.745,-27.805 -8.742,-27.728 -8.777,-27.66 -8.842,-27.618 -8.842,-27.618 -9.08,-27.541 -9.157,-27.536 -9.226,-27.571 -9.269,-27.634 -9.269,-27.634 -14.71,-43.423 -14.718,-43.482 -14.703,-43.539 -14.666,-43.586 -14.615,-43.615
  Bottom Layer region: -17.815,-47.465 -17.865,-47.434 -17.899,-47.387 -17.912,-47.329 -17.902,-47.271 -17.902,-47.271 -9.034,-24.188 -8.995,-24.131 -8.934,-24.097 -8.865,-24.094 -8.865,-24.094 -0.806,-25.661 -0.743,-25.689 -0.7,-25.743 -0.685,-25.811 -0.685,-25.811 -1.029,-45.836 -1.041,-45.894 -1.075,-45.942 -1.125,-45.973 -1.184,-45.983 -1.184,-45.983 -2.027,-45.954 -2.084,-45.94 -2.132,-45.905 -2.163,-45.854 -2.171,-45.796 -2.171,-45.796 -1.285,-28.972 -1.311,-28.791 -1.404,-28.635 -1.55,-28.526 -1.726,-28.481 -1.726,-28.481 -1.924,-28.43 -2.085,-28.306 -2.186,-28.129 -2.209,-27.926 -2.209,-27.926 -2.094,-26.615 -2.116,-26.472 -2.204,-26.356 -2.335,-26.295 -2.335,-26.295 -7.685,-25.255 -7.83,-25.262 -7.954,-25.337 -8.029,-25.462 -8.029,-25.462 -8.413,-26.72 -8.511,-26.899 -8.67,-27.026 -8.867,-27.081 -9.069,-27.054 -9.069,-27.054 -9.249,-27.029 -9.425,-27.076 -9.57,-27.186 -9.662,-27.343 -9.662,-27.343 -16.264,-46.534 -16.279,-46.65 -16.249,-46.763 -16.178,-46.856 -16.077,-46.915 -16.077,-46.915 -10.311,-48.51 -4.395,-49.398 -4.395,-49.398 -4.278,-49.386 -4.176,-49.329 -4.102,-49.238 -4.069,-49.126 -4.069,-49.126 -2.308,-29.056 -2.282,-28.984 -2.223,-28.934 -2.148,-28.919 -2.148,-28.919 -1.898,-28.937 -1.825,-28.962 -1.774,-29.019 -1.758,-29.094 -1.758,-29.094 -2.872,-50.466 -2.887,-50.523 -2.922,-50.57 -2.973,-50.6 -3.031,-50.608 -3.031,-50.608 -10.541,-49.591 -17.815,-47.465
  Bottom Layer region: -13.936,-46.878 -13.988,-46.85 -14.025,-46.805 -14.042,-46.749 -14.036,-46.69 -14.036,-46.69 -7.662,-25.861 -7.625,-25.799 -7.563,-25.762 -7.49,-25.758 -7.49,-25.758 -2.705,-26.688 -2.639,-26.719 -2.595,-26.777 -2.584,-26.849 -2.584,-26.849 -4.223,-45.652 -4.24,-45.709 -4.277,-45.755 -4.33,-45.783 -4.389,-45.789 -4.389,-45.789 -5.227,-45.7 -5.284,-45.683 -5.329,-45.645 -5.356,-45.592 -5.36,-45.533 -5.36,-45.533 -3.303,-28.811 -3.316,-28.63 -3.398,-28.467 -3.536,-28.348 -3.709,-28.291 -3.709,-28.291 -3.902,-28.227 -4.055,-28.092 -4.143,-27.908 -4.151,-27.704 -4.151,-27.704 -4.141,-27.635 -4.155,-27.484 -4.243,-27.36 -4.38,-27.294 -4.38,-27.294 -6.164,-26.947 -6.315,-26.957 -6.443,-27.04 -6.513,-27.174 -6.513,-27.174 -6.529,-27.242 -6.614,-27.427 -6.764,-27.565 -6.956,-27.633 -7.159,-27.621 -7.159,-27.621 -7.341,-27.609 -7.513,-27.667 -7.65,-27.787 -7.731,-27.951 -7.731,-27.951 -12.541,-45.922 -12.548,-46.038 -12.511,-46.149 -12.433,-46.237 -12.328,-46.289 -12.328,-46.289 -9.959,-46.856 -7.565,-47.301 -7.565,-47.301 -7.448,-47.297 -7.342,-47.248 -7.262,-47.162 -7.221,-47.052 -7.221,-47.052 -4.329,-28.824 -4.298,-28.754 -4.236,-28.708 -4.16,-28.699 -4.16,-28.699 -3.912,-28.734 -3.841,-28.764 -3.794,-28.825 -3.784,-28.901 -3.784,-28.901 -6.168,-48.363 -6.186,-48.418 -6.225,-48.463 -6.277,-48.489 -6.336,-48.493 -6.336,-48.493 -10.168,-47.837 -13.936,-46.878
  Bottom Layer region: -11.907,-45.902 -11.96,-45.876 -11.999,-45.832 -12.018,-45.777 -12.014,-45.718 -12.014,-45.718 -7.318,-28.214 -7.28,-28.147 -7.214,-28.108 -7.137,-28.107 -7.137,-28.107 -6.894,-28.168 -6.826,-28.205 -6.786,-28.27 -6.784,-28.347 -6.784,-28.347 -10.607,-44.93 -10.611,-45.048 -10.569,-45.157 -10.489,-45.242 -10.382,-45.29 -10.382,-45.29 -9.661,-45.45 -8.937,-45.598 -8.937,-45.598 -8.819,-45.597 -8.711,-45.552 -8.629,-45.469 -8.584,-45.36 -8.584,-45.36 -5.333,-28.658 -5.333,-28.6 -5.356,-28.546 -5.397,-28.504 -5.452,-28.482 -5.452,-28.482 -5.615,-28.45 -5.674,-28.451 -5.728,-28.473 -5.769,-28.515 -5.791,-28.569 -5.791,-28.569 -8.972,-44.961 -8.995,-45.016 -9.037,-45.057 -9.092,-45.08 -9.151,-45.079 -9.151,-45.079 -9.976,-44.904 -10.03,-44.88 -10.071,-44.837 -10.092,-44.782 -10.091,-44.723 -10.091,-44.723 -6.125,-27.568 -6.09,-27.5 -6.026,-27.459 -5.95,-27.454 -5.95,-27.454 -4.768,-27.684 -4.699,-27.717 -4.656,-27.779 -4.648,-27.855 -4.648,-27.855 -7.62,-46.652 -7.64,-46.707 -7.68,-46.75 -7.734,-46.774 -7.793,-46.776 -7.793,-46.776 -9.859,-46.385 -11.907,-45.902
  Bottom Layer region: 29.243,-35.506 29.889,-34.964 29.926,-34.918 29.942,-34.861 29.935,-34.802 29.906,-34.751 29.906,-34.751 18.946,-22.15 18.882,-22.107 18.806,-22.101 18.736,-22.134 18.736,-22.134 18.544,-22.295 18.5,-22.358 18.492,-22.434 18.524,-22.504 18.524,-22.504 29.03,-35.486 29.075,-35.524 29.132,-35.541 29.191,-35.535 29.243,-35.506
  Bottom Layer region: 32.482,-36.789 32.431,-36.819 32.373,-36.826 32.316,-36.811 32.27,-36.775 32.27,-36.775 17.63,-19.924 17.597,-19.861 17.597,-19.79 17.63,-19.727 17.63,-19.727 21.989,-14.713 22.047,-14.672 22.117,-14.662 22.184,-14.685 22.184,-14.685 38.326,-25.162 38.368,-25.203 38.391,-25.258 38.391,-25.317 38.369,-25.371 38.369,-25.371 37.897,-26.07 37.855,-26.112 37.8,-26.134 37.741,-26.133 37.687,-26.109 37.687,-26.109 23.888,-16.442 23.722,-16.369 23.54,-16.365 23.37,-16.431 23.239,-16.557 23.239,-16.557 23.091,-16.697 22.9,-16.768 22.696,-16.76 22.512,-16.672 22.512,-16.672 22.122,-16.378 21.985,-16.32 21.838,-16.336 21.715,-16.42 21.715,-16.42 19.283,-19.219 19.216,-19.351 19.221,-19.5 19.297,-19.628 19.297,-19.628 19.643,-19.973 19.755,-20.143 19.792,-20.343 19.748,-20.542 19.63,-20.708 19.63,-20.708 19.523,-20.856 19.482,-21.033 19.511,-21.213 19.607,-21.368 19.607,-21.368 32.383,-35.061 32.478,-35.13 32.593,-35.156 32.708,-35.137 32.808,-35.076 32.808,-35.076 35.691,-32.137 38.313,-28.962 38.313,-28.962 38.364,-28.856 38.371,-28.739 38.332,-28.629 38.254,-28.541 38.254,-28.541 23.418,-17.354 23.37,-17.294 23.359,-17.218 23.387,-17.147 23.387,-17.147 23.534,-16.944 23.594,-16.895 23.669,-16.882 23.742,-16.909 23.742,-16.909 39.947,-28.249 39.987,-28.292 40.009,-28.346 40.007,-28.405 39.983,-28.459 39.983,-28.459 36.471,-32.839 32.482,-36.789
  Bottom Layer region: 32.691,-34.501 32.641,-34.532 32.583,-34.542 32.526,-34.528 32.478,-34.494 32.478,-34.494 20.048,-21.157 20.012,-21.09 20.014,-21.013 20.054,-20.947 20.054,-20.947 20.234,-20.773 20.302,-20.735 20.378,-20.736 20.445,-20.775 20.445,-20.775 32.528,-32.851 32.625,-32.916 32.74,-32.939 32.855,-32.916 32.952,-32.85 32.952,-32.85 34.578,-31.134 36.115,-29.338 36.115,-29.338 36.17,-29.234 36.181,-29.118 36.146,-29.006 36.071,-28.916 36.071,-28.916 22.566,-17.973 22.427,-17.911 22.276,-17.924 22.151,-18.009 22.151,-18.009 20.917,-19.429 20.85,-19.565 20.858,-19.716 20.939,-19.845 20.939,-19.845 33.374,-31.435 33.409,-31.483 33.422,-31.54 33.412,-31.599 33.38,-31.648 33.38,-31.648 32.794,-32.255 32.745,-32.289 32.688,-32.301 32.629,-32.29 32.58,-32.257 32.58,-32.257 19.829,-19.499 19.792,-19.435 19.789,-19.361 19.822,-19.295 19.822,-19.295 21.866,-16.944 21.927,-16.902 22.001,-16.894 22.069,-16.923 22.069,-16.923 37.7,-28.695 37.739,-28.739 37.758,-28.794 37.755,-28.853 37.729,-28.906 37.729,-28.906 35.321,-31.803 32.691,-34.501
  Bottom Layer region: 33.9,-31.091 34.464,-30.464 34.494,-30.413 34.502,-30.355 34.487,-30.298 34.451,-30.251 34.451,-30.251 21.844,-19.298 21.775,-19.264 21.698,-19.269 21.634,-19.311 21.634,-19.311 21.466,-19.497 21.431,-19.565 21.435,-19.642 21.475,-19.707 21.475,-19.707 33.686,-31.1 33.736,-31.131 33.795,-31.14 33.852,-31.126 33.9,-31.091
  Bottom Layer region: 34.964,-29.889 35.506,-29.243 35.535,-29.191 35.541,-29.132 35.524,-29.075 35.486,-29.03 35.486,-29.03 22.504,-18.524 22.434,-18.492 22.358,-18.5 22.295,-18.544 22.295,-18.544 22.134,-18.736 22.101,-18.806 22.107,-18.882 22.15,-18.946 22.15,-18.946 34.751,-29.906 34.802,-29.935 34.861,-29.942 34.918,-29.926 34.964,-29.889
  Bottom Layer region: 38.784,-24.732 38.743,-24.775 38.689,-24.799 38.63,-24.8 38.575,-24.778 38.575,-24.778 24.571,-15.679 24.52,-15.622 24.503,-15.547 24.526,-15.473 24.526,-15.473 24.659,-15.261 24.715,-15.208 24.789,-15.19 24.863,-15.211 24.863,-15.211 39.181,-23.809 39.224,-23.849 39.249,-23.902 39.251,-23.961 39.231,-24.017 39.231,-24.017
  Bottom Layer lines w1.1: -53.492,0.934 -51.742,0.903 ; -51.742,0.903 ccw(c0,0) -49.217,-15.992 -43.273,-14.06 ; -45.473,1.588 -46.971,1.64 cw(c0,0) -43.577,17.606 -42.187,17.045 ; 1.588,45.473 1.806,51.718 cw(c0,0) 19.386,47.982 17.045,42.187 ; 6.332,-45.058 6.541,-46.542 ccw(c0,0) 22.065,-41.498 21.361,-40.174 ; 28.013,-35.855 30.878,-39.522 ; 30.446,33.813 34.619,38.448 cw(c0.018,-0.033) 51.697,2.679 ; 30.86,-39.489 ccw(c-0.018,0.033) 42.515,-26.544 ; 38.587,-24.111 42.533,-26.577 ; 51.703,2.68 53.475,1.634

## Part data
L?: library part L_3phase

## Via types
v1: diameter 0.55, hole 0.2, Top Layer to Bottom Layer, 1440 vias
v2: diameter 0.7, hole 0.3, Top Layer to Bottom Layer, 64 vias

## Nets (pads, with @x,y where several pads share a name; then routed paths per layer and width w, separated by ;. In a path a pad name is that pad's centre, name@x,y a point inside that pad or via, vN(x,y) a via of type N, cw(c..) or ccw(c..) an arc to the next point about the centre after c; other vN are vias at no path point)
pads on no net: Designator5.1 Designator5_1.1 Designator7.1 Designator7_1.1 Designator9.1 Designator9_1.1 Designator11.1 Designator11_1.1 L?.A L?.A' L?.B L?.B' L?.C L?.C'